# Altium PCB ledKjoleribbeKort.PcbDoc
Units mm, origin at the board's own origin, x right, y up, seen from the top; angles counter-clockwise.
Board outline 100 x 50 mm, 2 copper layers (Top Layer, Bottom Layer); 5 components, 7 nets, 22 pads, 0 vias.
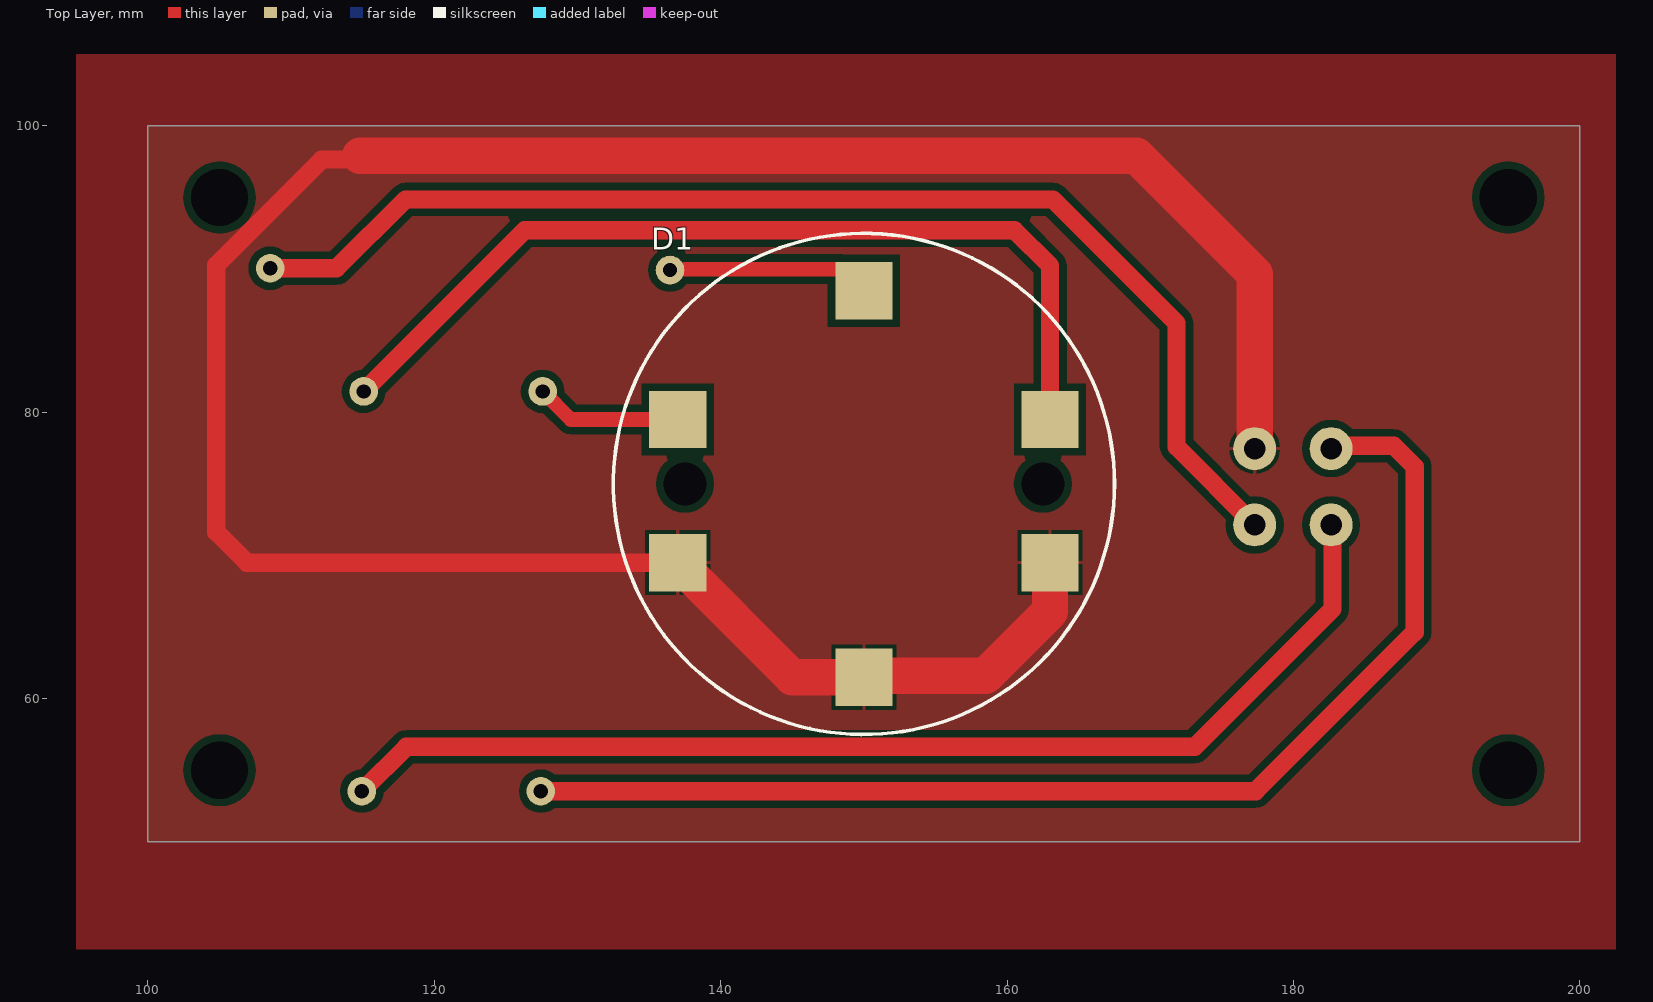
[diagram p0: Top Layer view]
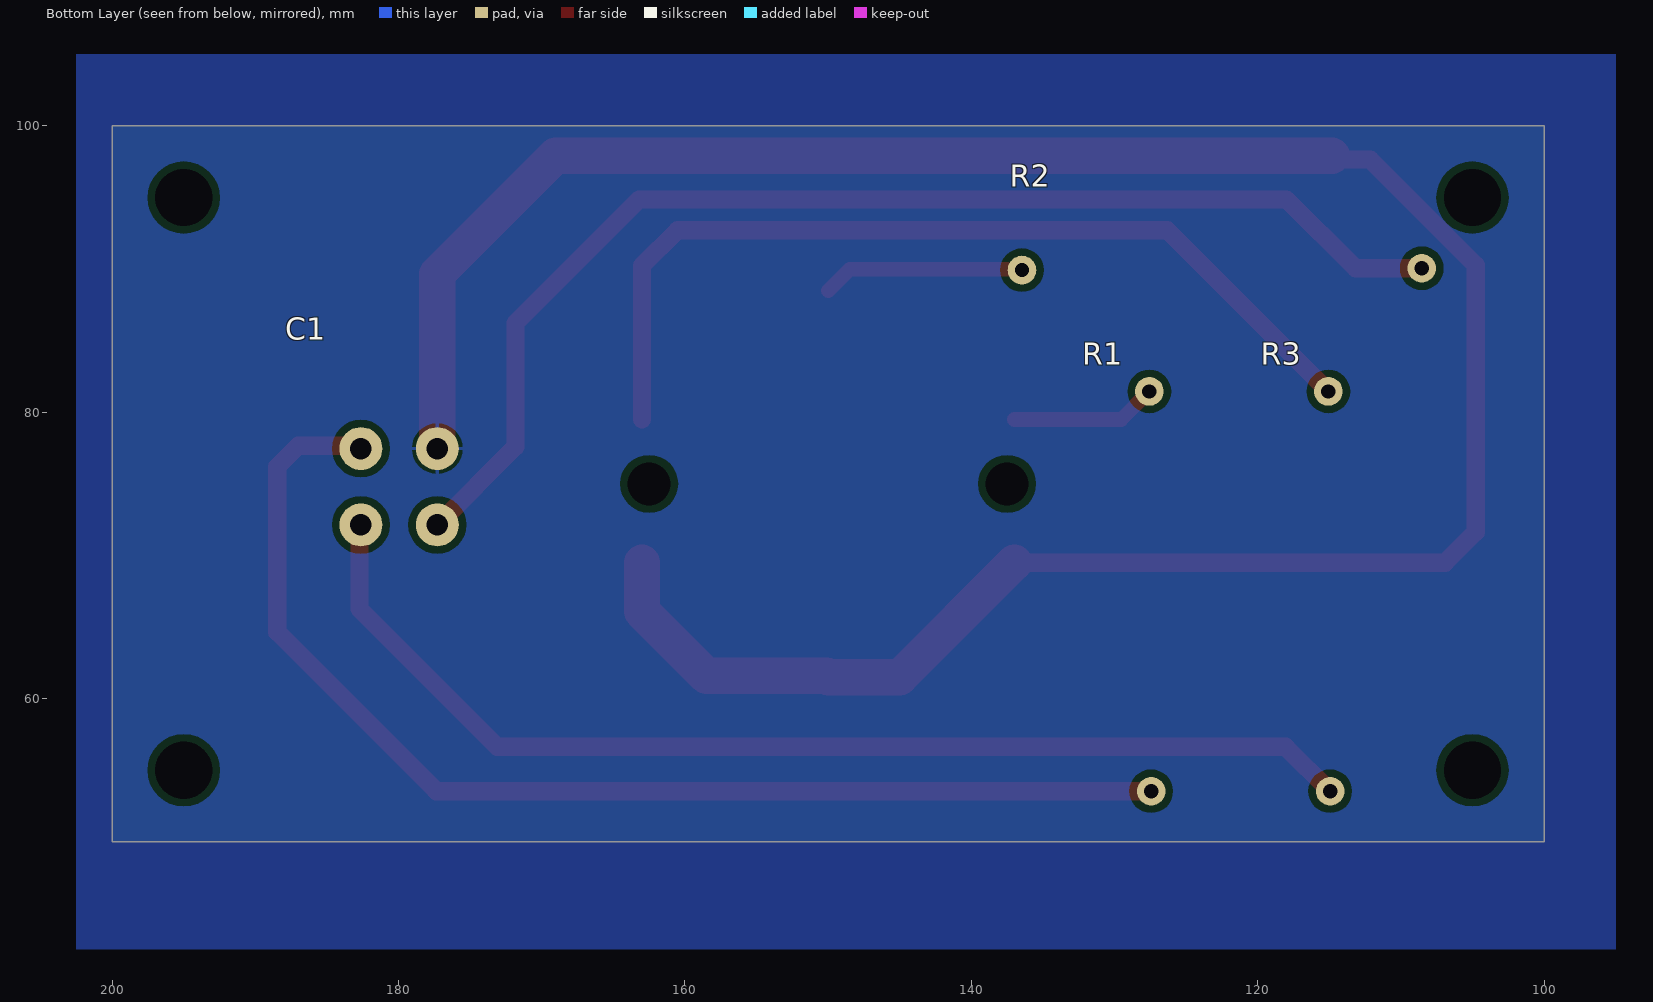
[diagram p1: Bottom Layer view, seen from below]
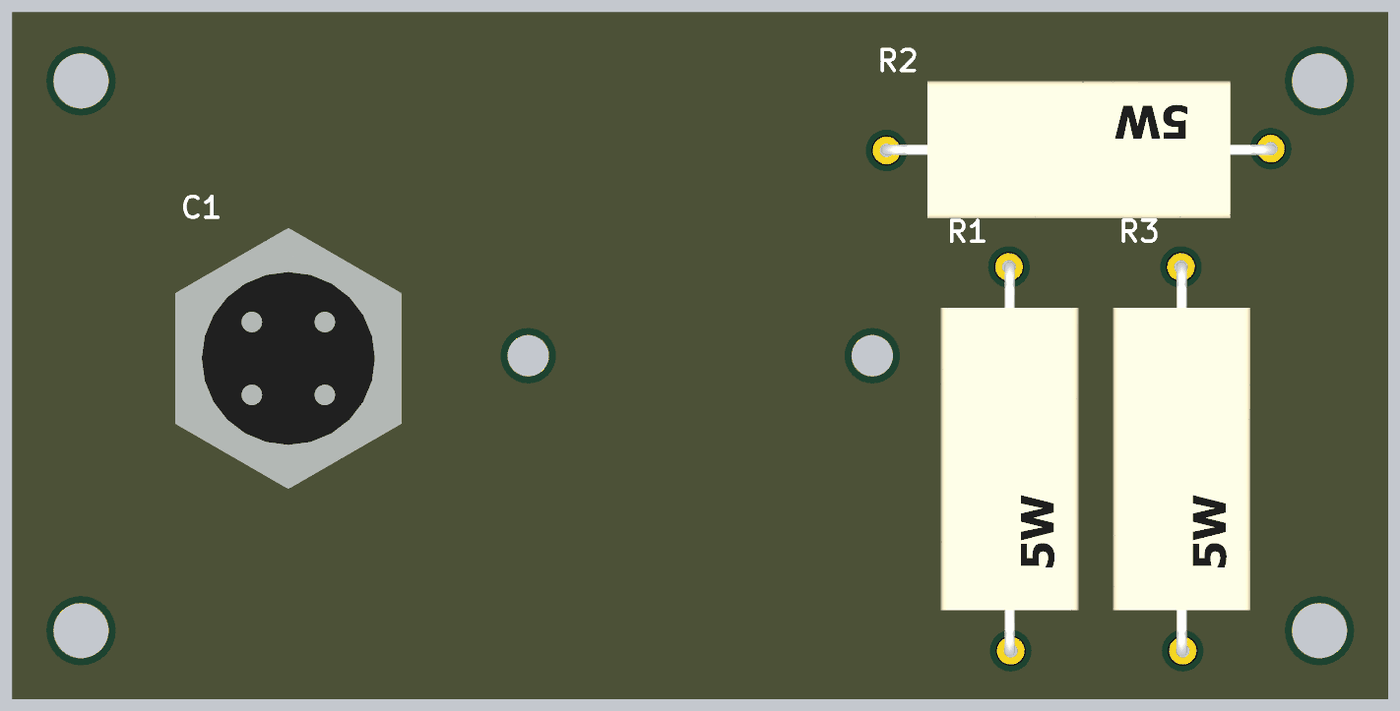
[diagram p2: 3D render of the assembled board from below, using the file's embedded part models]

## Layer stack, top to bottom
Top Solder: solder mask 0.0102, Solder Resist, Dk 3.5
Top Layer: signal copper 0.0356
Dielectric 1: dielectric 0.32, FR-4, Dk 4.8
Bottom Layer: signal copper 0.0356
Bottom Solder: solder mask 0.0102, Solder Resist, Dk 3.5

## Board outline
200,100 200,50 100,50 100,100

## Design rules (kind name [scope] priority, off if disabled: settings)
Clearance [All] p1: gap=0.508
PolygonConnect [All] p1: connectstyle=Relief reliefconductorwidth=0.254 reliefentries=4 polygonreliefangle="90 Angle" airgapwidth=0.254
RoutingVias [All] p1: holewidth=0.711 width=1.27 viastyle="Through Hole" minholewidth=0.711 minwidth=1.27 maxholewidth=0.711 maxwidth=1.27
SolderMaskExpansion [All] p1: expansion=0.102
UnpouredPolygon [All] p1: allowunpoured=FALSE
Width [All] p1: maxlimit=25.4 minlimit=0.254 preferedwidth=0.254
29 further rules are at their usual default settings.

## Components (designator, comment, footprint, x,y, rotation, side; value= is the part's Value field where it differs from the comment)
C1 "GX10-4" GX16-4 179.959,74.803 r180 bottom
D1 "LED_RGB" LED_RGB_3W 150,75 r0 top
R1 "RESISTOR" EFFECT_RESISTOR_5W 127.5,67.5 r90 bottom
R2 "RESISTOR" EFFECT_RESISTOR_5W 122.5,90 r0 bottom
R3 "RESISTOR" EFFECT_RESISTOR_5W 115,67.5 r90 bottom

## Footprints (in the part's own frame and the unit in brackets; to place one, negate y for a bottom-side part, rotate by r counter-clockwise, add the part's x,y. Pads: shape width x height; smd on the part's side, far side on the other; paste and mask are expansions set on the pad)
EFFECT_RESISTOR_5W [mm]
  round 2 hole 1: 1(-13.961,-0.063) 2(13.961,0.063)
  body extent -14.35,-4.98 14.34,5.02, height 9
GX16-4 [mm]
  round 3 hole 1.5: 1(-2.667,-2.667) 2(2.667,-2.667) 3(-2.667,2.667) 4(2.667,2.667)
  body extent -8.2,-9.5 8.25,9.5, height 16
LED_RGB_3W [mm] "3w rgb som i lysreklamen"
  rect 4x4 smd: 1(-13,4.5) 2(0,13.5) 3(13,4.5) 4(13,-5.5) 5(0,-13.5) 6(-13,-5.5)
  body extent -9.83,-10 9.83,10, height 3.65

## Free pads (board coordinates)
  round 1 hole 4: 0(105,95) 1(195,95) 2(195,55) 3(105,55)
  round 1 hole 3: 4(162.5,75) 5(137.5,75)

## Nets (pads, with @x,y where several pads share a name; then routed paths per layer and width w, separated by ;. In a path a pad name is that pad's centre, name@x,y a point inside that pad or via, vN(x,y) a via of type N, cw(c..) or ccw(c..) an arc to the next point about the centre after c; other vN are vias at no path point)
B: C1.1 R3.1 | length 79.1
  Top Layer w1.27: R3.1 118.039,56.642 173.101,56.642 182.723,66.264 C1.1@182.723,72.333
G: C1.2 R2.1 | length 85.2
  Top Layer w1.27: R2.1 113.178,90.064 117.983,94.869 163.195,94.869 171.831,86.233 171.831,77.597 C1.2
GND: C1.4 D1.4 D1.5 D1.6 | length 177.7
  Top Layer w1.27: 114.808,97.917 114.554,97.663 112.141,97.663 104.775,90.297 104.775,71.628 106.903,69.5 D1.6
  Top Layer w2.54: 114.808,97.917 169.037,97.917 177.292,89.662 C1.4 ; D1.6 145,61.5 D1.5 150.095,61.595 158.496,61.595 163,66.099 D1.4
NetD1_1: D1.1 R1.2 | length 10.2
  Top Layer w1.016: R1.2 129.524,79.5 D1.1
NetD1_2: D1.2 R2.2 | length 13.1
  Top Layer w1.016: 137.5,90 148.5,90 D1.2
NetD1_3: D1.3 R3.2 | length 64.4
  Top Layer w1.27: R3.2 126.313,92.71 160.528,92.71 163,90.238 D1.3
R: C1.3 R1.1 | length 83.5
  Top Layer w1.27: R1.1 177.364,53.539 188.468,64.643 188.468,76.2 187.001,77.667 C1.3@182.723,77.667

## Polygon pours and split planes (outlines as drawn)
GND on Top Layer "porpoly" (solid, pour order 4): 95,105 202.5,105 202.5,45 202.5,42.5 95,42.5
GND on Bottom Layer "porpoly" (solid, pour order 6): 202.5,105 202.5,42.5 95,42.5 95,105

## Silkscreen, mask and mechanical layers (free items; w line width, h text height)
Top Overlay:
  circle w0.254: c150,75 r17.5